# Altium PCB Regulador_5v_FF21.PcbDoc
Units mm, origin at the board's own origin, x right, y up, seen from the top; angles counter-clockwise.
Board outline 49 x 26 mm, 2 copper layers (Top Layer, Bottom Layer); 17 components, 10 nets, 41 pads, 0 vias.
Unrouted connection lines stored in the file: 29.
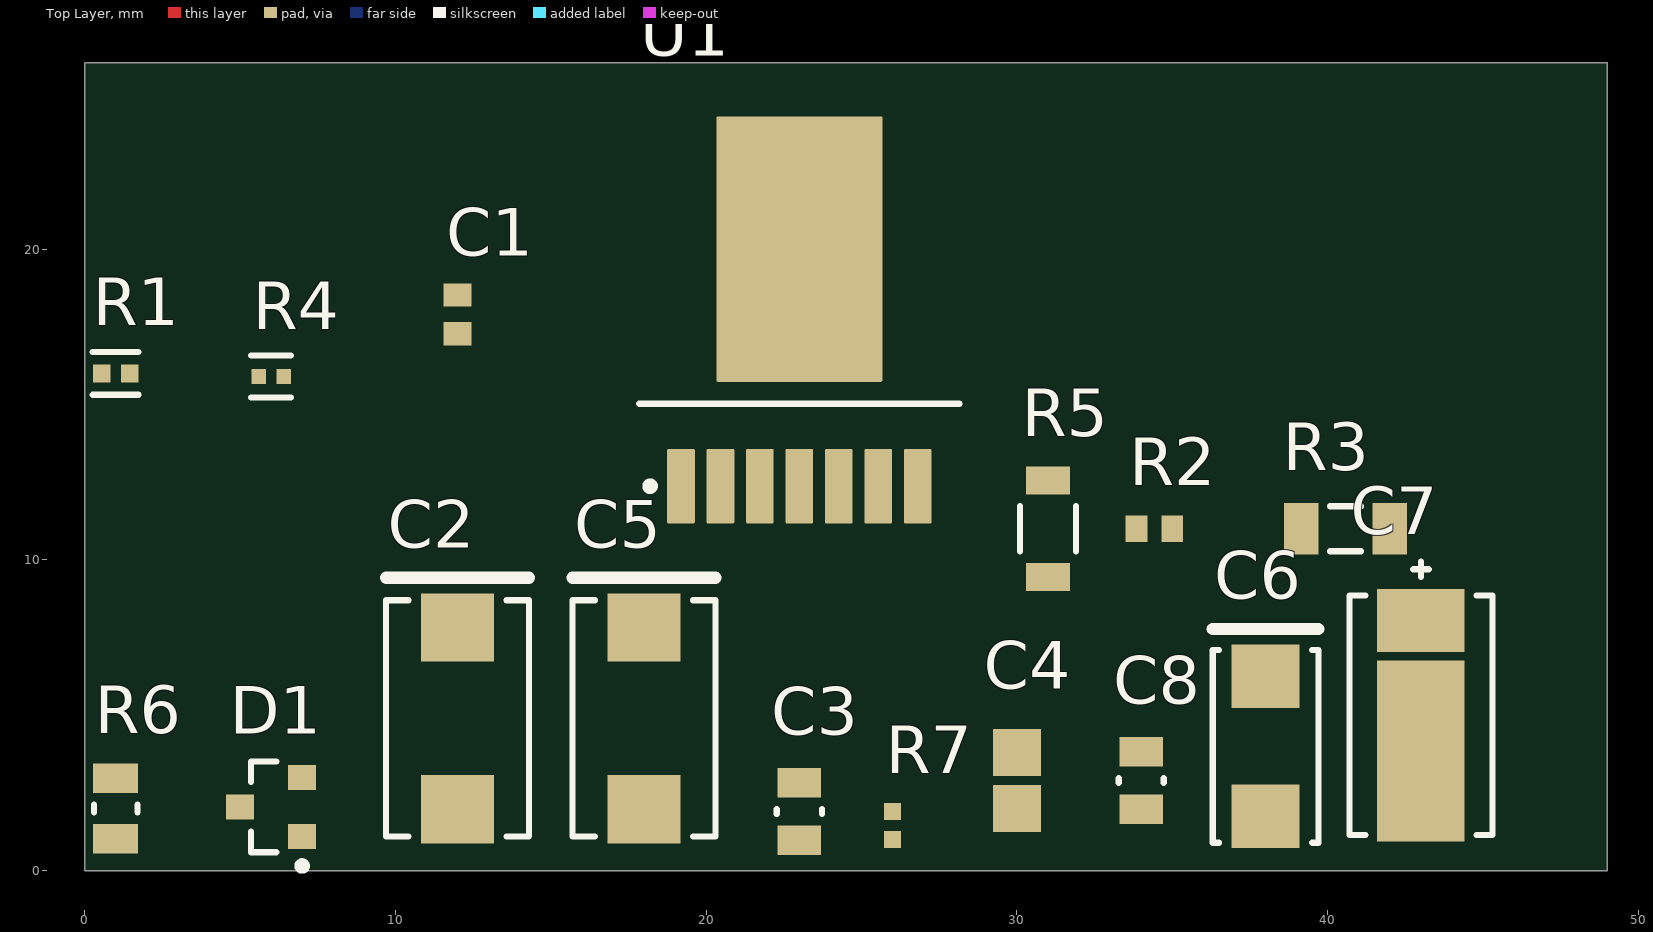
[diagram p0: Top Layer view]
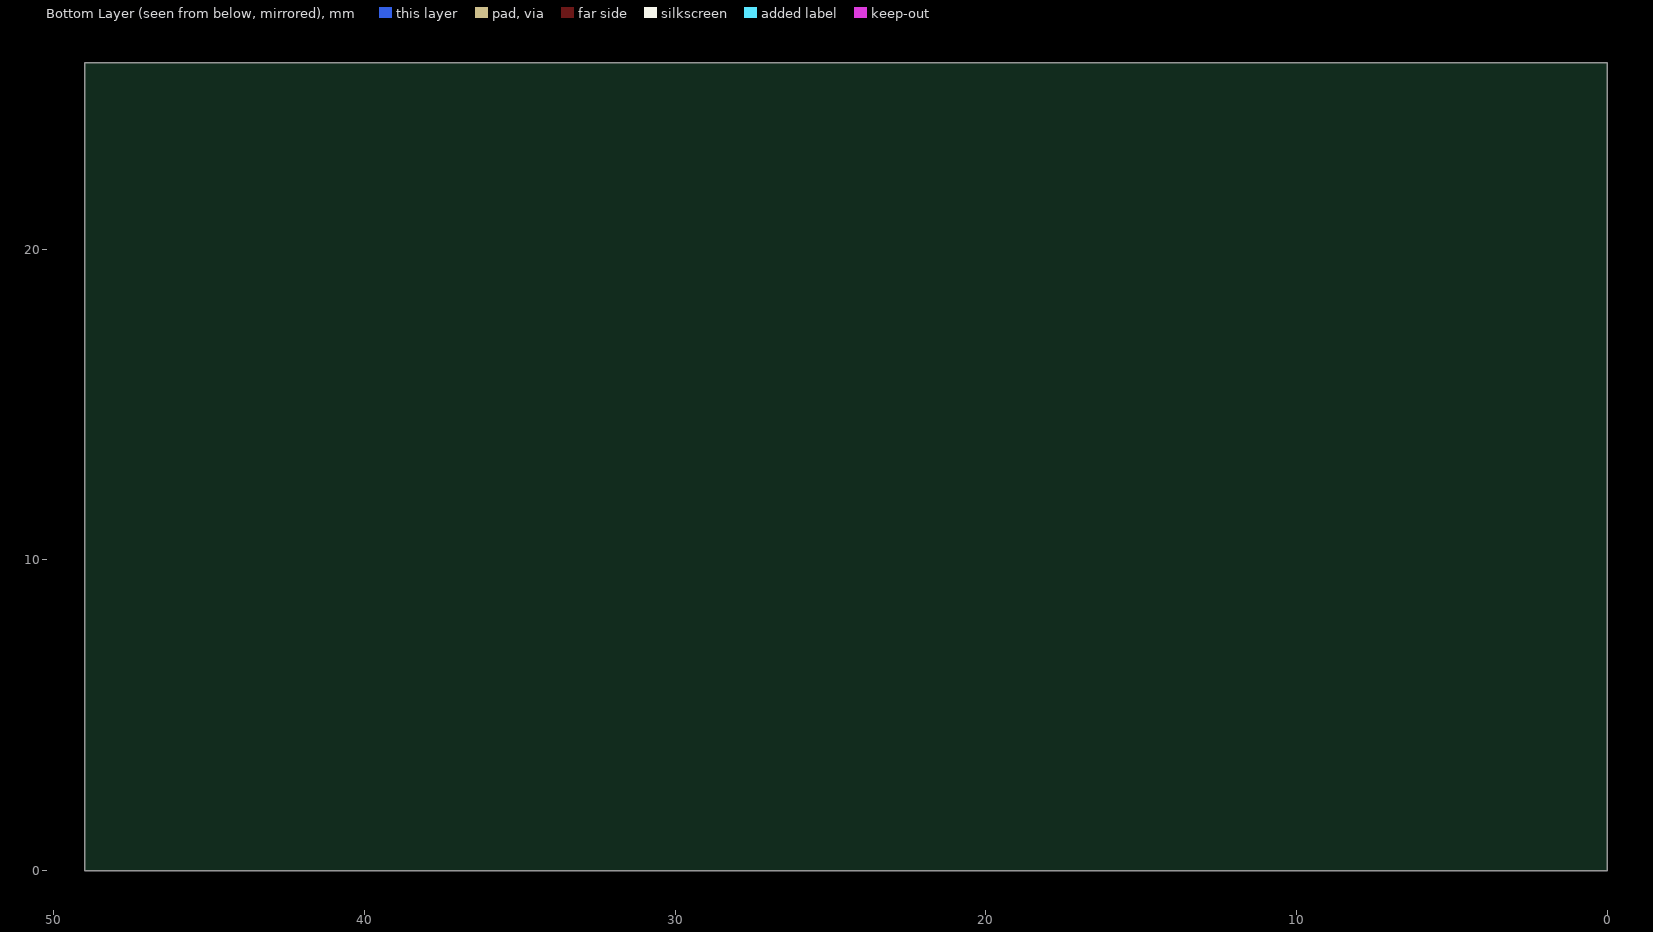
[diagram p1: Bottom Layer view, seen from below]

## Layer stack, top to bottom
Top Solder: solder mask 0.0102, Solder Resist, Dk 3.5
Top Layer: signal copper 0.0356
Dielectric 1: dielectric 0.32, FR-4, Dk 4.8
Bottom Layer: signal copper 0.0356
Bottom Solder: solder mask 0.0102, Solder Resist, Dk 3.5

## Board outline
0,0 49,0 49,26 0,26

## Design rules (kind name [scope] priority, off if disabled: settings)
Clearance [All] p1: gap=0.254 ignorepadtopadclearanceinfootprint=FALSE except(0: Arc-Hole Track-Hole SMDPad-Hole THPad-Hole Via-Hole Fill-Hole Poly-Hole Region-Hole Text-Hole)
PolygonConnect [All] p1: connectstyle=Relief reliefconductorwidth=0.254 reliefentries=4 polygonreliefangle="90 Angle" airgapwidth=0.254
RoomDefinition Regulador_5v_FF21 [InComponentClass('Regulador_5v_FF21')] p1: confinementstyle=ConfineIn formatcopy=TRUE lockcomponents=FALSE outline 0,-0.1 49,-0.1 49,26 0,26
RoutingVias [All] p1: holewidth=0.711 width=1.27 viastyle="Through Hole" minholewidth=0.711 minwidth=1.27 maxholewidth=0.711 maxwidth=1.27
SolderMaskExpansion [All] p1: expansion=0.102 istentingtop=FALSE
Width [All] p1: maxlimit=0.254 minlimit=0.254 preferedwidth=0.254
30 further rules are at their usual default settings.

## Components (designator, comment, footprint, x,y, rotation, side; value= is the part's Value field where it differs from the comment)
C1 "VJ0603Y103KXAAC31" CAPC1608X97X38LL15T08 12,17.9 r270 top
C2 "T495D157K010ATE100" KEMT-T495-D_L 12,4.9 r270 top
C3 "CC0805KRX7R9BB473" FP-CC0805-0_85-MFG 23,1.9 r270 top value="47 nF"
C4 "C0805F474K3RACTU" CAPC2013X140X50ML20T25 30,2.9 r90 top
C5 "T495D157K010ATE100" KEMT-T495-D_L 18,4.9 r270 top
C6 "TPSC107K010R0075" AVX-C2312_L 38,4 r270 top
C7 "T528Z227M006ATE009" FP-T528Z227M006ATE009-MFG 43,5 r270 top
C8 "CC0805KRX7R9BB473" FP-CC0805-0_85-MFG 34,2.9 r270 top value="47 nF"
D1 "SZBZX84B5V1LT1G" ONSC-SOT-23-3-318-08_V 6,2.05 r180 top
R1 "CRCW040220K0FKED" FP-CRCW0402-e3-IPC_B 1,16 r0 top
R2 "CRCW060321K0FKEA" RESC1609X50X30LL10T20 34.425,11 r0 top
R3 "ERJ-8ENF23R7V" RESC3216X70X50NL05T20 40.575,11 r0 top
R4 "CRCW0402100RFKED" FP-CRCW0402-e3-IPC_C 6,15.9 r0 top
R5 "RN732BLTD4001B25" FP-RN732B-MFG 31,11 r90 top
R6 "CRCW080540K0FKEA" FP-CRCW0805-e3-MFG 1,2 r270 top
R7 "CRCW04021K50FKED" RESC1005X40X25NL05T05 26,1.45 r90 top
U1 "LMZ23605TZ/NOPB" NDW0007A_V 23,17.72 r90 top

## Footprints (in the part's own frame and the unit in brackets; to place one, negate y for a bottom-side part, rotate by r counter-clockwise, add the part's x,y. Pads: shape width x height; smd on the part's side, far side on the other; paste and mask are expansions set on the pad)
AVX-C2312_L [mm] "Molded Capacitor, 2-Leads, Body 6.2x3.4mm, IPC High Density"
  rect 2.05x2.2 smd: 1(-2.25,0) 2(2.25,0)
  silkscreen extent -3.77,-1.7 3.1,1.7, body extent -3.32,-1.7 3.32,1.7, height 2.8
CAPC1608X97X38LL15T08 [mm] "Chip Capacitor, 2-Leads, Body 1.60x0.80mm, IPC High Density"
  rect 0.75x0.9 smd: 1(-0.625,0) 2(0.625,0)
  body extent -0.87,-0.48 0.87,0.48, height 0.97
CAPC2013X140X50ML20T25 [mm] "Chip Capacitor, 2-Leads, Body 2.00x1.25mm, IPC Low Density"
  rect 1.5x1.55 smd: 1(-0.9,0) 2(0.9,0)
  body extent -1.1,-0.72 1.1,0.72, height 1.4
FP-CC0805-0_85-MFG [mm]
  rect 0.95x1.4 smd paste+0 mask+0: 1(-0.925,0) 2(0.925,0)
  silkscreen extent -0.08,-0.72 0.08,0.72, body extent -1.6,-1.05 1.6,1.05, height 0.25
FP-CRCW0402-e3-IPC_B [mm]
  rect 0.568x0.572 smd paste+0 mask+0: 1(-0.452,0) 2(0.452,0)
  silkscreen extent -0.74,-0.69 0.74,0.69, body extent -0.89,-0.44 0.89,0.44, height 0.25
FP-CRCW0402-e3-IPC_C [mm]
  rect 0.468x0.472 smd paste+0 mask+0: 1(-0.402,0) 2(0.402,0)
  silkscreen extent -0.64,-0.67 0.64,0.67, body extent -0.74,-0.38 0.74,0.38, height 0.25
FP-CRCW0805-e3-MFG [mm]
  rect 0.95x1.45 smd paste+0 mask+0: 1(-0.975,0) 2(0.975,0)
  silkscreen extent -0.13,-0.7 0.13,0.7, body extent -1.55,-0.82 1.55,0.82, height 0.25
FP-RN732B-MFG [mm]
  rect 0.9x1.4 smd paste+0 mask+0: 1(-1.55,0) 2(1.55,0)
  silkscreen extent -0.72,-0.9 0.72,0.9, body extent -2.1,-1 2.1,1, height 0.25
FP-T528Z227M006ATE009-MFG [mm]
  rect 5.82x2.82 smd paste+0 mask+0: 1(1.15,0)
  rect 2.02x2.82 smd paste+0 mask+0: 2(-3.05,0)
  silkscreen extent -4.95,-2.3 3.85,2.3, body extent -4.18,-2.42 4.18,2.42, height 0.25
KEMT-T495-D_L [mm] "Molded Capacitor, 2-Leads, Body 7.6x4.6mm, IPC High Density"
  rect 2.2x2.35 smd: 1(-2.925,0) 2(2.925,0)
  silkscreen extent -4.52,-2.3 3.8,2.3, body extent -4.02,-2.3 4.02,2.3, height 3.1
NDW0007A_V [mm] "D2-PAK, 8-Leads, Body 9.9x10.2mm, Pitch 1.27mm, Lead Span 13.8mm, TI Recommended"
  rrect11% 2.41x0.89 smd: 1(-5.35,3.81) 2(-5.35,2.54) 3(-5.35,1.27) 4(-5.35,0) 5(-5.35,-1.27) 6(-5.35,-2.54) 7(-5.35,-3.81)
  rrect2% 8.54x5.35 smd: 8(2.28,0)
  silkscreen extent -5.47,-5.15 -2.7,5.15, body extent -2.55,-5.2 7.55,5.2, height 4.67
ONSC-SOT-23-3-318-08_V [mm] "SOT23, 3-Leads, Body 2.92x1.3mm, Pitch 0.95mm"
  rect 0.9x0.8 smd: 1(-1,0.95) 2(-1,-0.95) 3(1,0)
  silkscreen extent -1.13,-1.46 0.65,2.02, body extent -0.65,-1.46 0.65,1.46, height 1.11
RESC1005X40X25NL05T05 [mm] "Chip Resistor, 2-Leads, Body 1.00x0.50mm, IPC Medium Density"
  rect 0.55x0.55 smd: 1(-0.45,0) 2(0.45,0)
  body extent -0.53,-0.27 0.53,0.28, height 0.4
RESC1609X50X30LL10T20 [mm] "Chip Resistor, 2-Leads, Body 1.55x0.85mm, IPC High Density"
  rect 0.7x0.85 smd: 1(-0.575,0) 2(0.575,0)
  body extent -0.82,-0.48 0.82,0.48, height 0.5
RESC3216X70X50NL05T20 [mm] "Chip Resistor, 2-Leads, Body 3.20x1.60mm, IPC Medium Density"
  rect 1.1x1.65 smd: 1(-1.425,0) 2(1.425,0)
  silkscreen extent -0.5,-0.72 0.5,0.72, body extent -1.63,-0.82 1.62,0.82, height 0.7

## Part data
C1: library part CMP-2006-00011-1, Manufacturer=Vitramon, Part Number=VJ0603Y103KXAAC31
C2 C5: library part CMP-2000-07208-1, "Capacitor, Tantalum, 150 uF, +/- 10%, 10 V, -55 to 125 degC, 2-Pin SMD, RoHS, Tape and Reel", Capacitance=150µF, Capacitance Tolerance=±10%, Capacitor Case Style=2917, Capacitor Terminals=SMD, Manufacturer=Kemet, Operating Temperature Range=-55°Cto+125°C, Package Description="2-Pin Surface Mount Device, Body 7.3 x 4.3 mm", Package Reference=T495-D, Voltage Rating=10V, Datasheet URL=http://capacitoredge.kemet.com/capedge2/DataSheet/Datasheet-T495D157K010ATE100.pdf?pn=T495D157K010ATE100, Datasheet Version=09/2016, ESR=0.1ohm, Manufacturer URL=http://www.kemet.com/, Mounting Technology=SurfaceMount, MSL=MSL1-Unlimited
C3 C8: library part CMP-03422-000052-1, "CAP CER 0.047UF 50V X7R 0805", Capacitance="47 nF", Manufacturer=Yageo, Package=CC0805-0.85, Temperature="-30°C to +85°C", Temperature Characteristic=X7R, Temperature Range High=+85°C, Temperature Range Low=-30°C, Tolerance=0.1, Voltage Rating="50 V", Automotive=No, Category=Cap, ComponentLink2Description=Datasheet, ComponentLink2URL=http://www.yageo.com/documents/recent/UPY-GPHC_Y5V_6.3V-to-50V_8.pdf, Device Class L1="Passive Components", Device Class L2=Capacitors, Device Class L3="Ceramic Capacitors", Digikey Description="CAP CER 0.047UF 50V X7R 0805", Footprint Url=http://www.yageo.com/exep/pages/download/literatures/UPY-C_GEN_24.pdf, Height=0.95mm, Ipc Land Pattern Name=CAPC200125X85, Lead Free=Yes, Manufacturer Part Number=CC0805KRX7R9BB473, Material=Ceramic, Mouser Description="Multilayer Ceramic Capacitors MLCC - SMD/SMT 47nF 50V X7R 10%", Octopart=https://octopart.com/cc0805krx7r9bb473-yageo-42181304, RoHS=TRUE
C4: library part CMP-2007-03309-1, Manufacturer=Kemet, Part Number=C0805F474K3RACTU
C6: library part CMP-2000-07293-1, "TPS Series, Low ESR, 100 uF, +/- 10%, 10 V, -55 to 125 degC, 2-Pin SMD (2312), RoHS, Tape and Reel", Capacitance=100000000pF, Case Code=C, Case Style=Molded, Manufacturer=AVX, Operating Temp Range=-55Cto125C, Package / Case=6032-28, Package Description="2-Pin Surface Mount Device, Body 6 x 3.25 mm", Package Reference=C2312, Tolerance (+ or -)=10%, Voltage=10VDC, Construction=SMTChip, Datasheet URL=http://download.siliconexpert.com/pdfs/2016/2/7/1/56/13/306/avx_/manual/6tps.pdf, Datasheet Version=01/2016, DCL=10uA, DELETED=Compliant, DF=8%, ESR=0.075ohm, Failure Rate=NotRequired, Insulation=NotRequired, Lead Spacing (nom)=NotRequiredmm, Length W/Weld=NotRequiredmm, Length W/Weld (max)=NotRequiredmm, Manufacturer URL=http://www.avx.com/, Mounting Style=SurfaceMount, Mounting Technology=SurfaceMount, Package URL=http://download.siliconexpert.com/pdfs/2016/2/7/1/56/13/306/avx_/manual/6tps.pdf, Packaging=TapeandReel, Polarity=Polar, Product Depth (mm)=3.2mm, Product Diameter (mm)=NotRequiredmm, Product Height (mm)=2.6mm, Product Length (mm)=6mm, Rad Hardened=No, Seal=NotRequired, Seated Plane Height=NotRequiredmm, Wire Form=NotRequired
C7: library part CMP-03017-000006-1, "CAP TANT POLY 220UF 6.3V 2917", Capacitance=220uF, Case Code (Imperial)=2917, Case Code (Metric)=7343, ESR (Equivalent Series Resistance)=9mR, Leakage Current=138.6uA, Max Operating Temperature=105°C, Min Operating Temperature=-55°C, Package Quantity=1, Ripple Current=6A, Tolerance=20%, Voltage Rating=6.3V, Case/Package=2917, Construction=Flat, Depth=4.3mm, Dissipation Factor=10%, Features="General Purpose", Height=1.7mm, Height - Seated (Max)=0.067inch, Length=7.3mm, Mount="Surface Mount", Packaging="Tape and Reel", Polarity=Polar, REACH SVHC="No SVHC", RoHS Compliant=Yes, Series="KO-CAP T528", Termination=SMD/SMT, Voltage Rating (DC)=6.3V, Width=4.3mm
D1: library part CMP-1060-00895-1, "Zener Voltage Regulator, 225 mW, 3-Pin SOT-23, Pb-Free, Tape and Reel", Manufacturer="On Semiconductor", ComponentLink1Description="Manufacturer URL", ComponentLink1URL=http://www.onsemi.com/, ComponentLink2Description=Datasheet, ComponentLink2URL=http://www.onsemi.com/pub_link/Collateral/BZX84C2V4LT1-D.PDF, ComponentLink3Description="Package Specification", ComponentLink3URL=http://www.onsemi.cn/pub_link/Collateral/318-08.PDF, DatasheetVersion="Rev. 17", Mounting Technology="Surface Mount", PackageDescription="3-Pin Small Outline Transistor, Body 2.92 x 1.3 mm, Pitch 0.95 mm", PackageReference=SOT-23-3-318-08, PackageVersion="Rev. AP, 11/2009", Packing="Tape and Reel", PartNumber=SZBZX84B5V1LT1G, RoHS=Pb-Free, VZ Typ (V)=5.1
R1: library part CMP-2002-08356-2, "RES Thick Film, 20kΩ, 1%, 0.063W, 100ppm/°C, 0402", Case Code (Imperial)=0402, Case Code (Metric)=1005, Max Operating Temperature=155°C, Max Power Dissipation=63mW, Min Operating Temperature=-55°C, Package Quantity=10, Resistance=20kR, Temperature Coefficient=100ppm/°C, Tolerance=1%, Voltage Rating=50V, Case/Package=0402, Composition="Thick Film", Contact Plating=Tin, Depth=0.5mm, Features="Automotive AEC-Q200", Height=0.35mm, Lead Free="Lead Free", Length=1mm, Military Standard=Not, Mount="Surface Mount", Number of Pins=2, Number of Terminations=2, Packaging="Tape and Reel", Power Rating=63mW, Radiation Hardening=No, Termination=SMD/SMT, Voltage Rating (DC)=50V, Weight=2.3E-05oz, Width=0.5mm, Working Voltage=50V
R2: library part CMP-2000-03080-1, Manufacturer="Vishay Dale", Part Number=CRCW060321K0FKEA
R3: library part CMP-2003-00238-1, Manufacturer=Panasonic, Part Number=ERJ-8ENF23R7V
R4: library part CMP-1011-00397-3, "RES Thick Film, 100Ω, 1%, 0.063W, 100ppm/°C, 0402", Case Code (Imperial)=0402, Case Code (Metric)=1005, Max Operating Temperature=155°C, Max Power Dissipation=63mW, Min Operating Temperature=-55°C, Package Quantity=10, Resistance=100R, Temperature Coefficient=100ppm/°C, Tolerance=1%, Voltage Rating=50V, Case/Package=0402, Composition="Thick Film", Contact Plating=Tin, Depth=0.5mm, Features="Automotive AEC-Q200", Height=0.35mm, Lead Free="Lead Free", Length=1mm, Military Standard=Not, Mount="Surface Mount", Number of Terminations=2, Packaging="Tape and Reel", Power Rating=63mW, Radiation Hardening=No, Termination=SMD/SMT, Voltage Rating (DC)=50V, Weight=2.3E-05oz, Width=0.02inch, Working Voltage=50V
R5: library part CMP-04015-017647-1, "4kΩ ±0.1% 0.125W, 1/8W Chip Resistor 1206 (3216 Metric) Moisture Resistant Thin Film", Case Code (Imperial)=1206, Case Code (Metric)=3216, Max Operating Temperature=125°C, Min Operating Temperature=-55°C, Power Rating=125mW, Resistance=4kR, Temperature Coefficient=25ppm/°C, Tolerance=0.1%, Voltage Rating=150V, Case/Package=1206, Composition="Thin Film", Height=0.6mm, Length=3.2mm, Packaging="Tape and Reel", Termination=SMD/SMT, Weight=0.000571oz, Width=1.6mm
R6: library part CMP-02407-003498-1, "RES Thick Film, 40kΩ, 1%, 0.125W, 100ppm/°C, 0805", Case/Package=0805, Max Operating Temperature=155°C, Max Power Dissipation=125mW, Min Operating Temperature=-55°C, Package Quantity=5000, Resistance=40kR, Temperature Coefficient=100ppm/°C, Tolerance=1%, Composition="Thick Film", Features="Automotive AEC-Q200", Height=0.02inch, Lead Free="Lead Free", Length=0.079inch, Number of Terminations=2, Packaging="Tape and Reel", Width=0.049inch
R7: library part CMP-2002-08297-1, Manufacturer="Vishay Dale", Part Number=CRCW04021K50FKED
U1: library part CMP-0069-02058-2, "5A SIMPLE SWITCHER® Power Module with 36V Maximum Input Voltage, 7 pin TO-PMOD, 45 Rail", Manufacturer="Texas Instruments", PackageTopMarking=NSUZXYTTE#*LMZ23605, PowerWise=N, ComponentLink1Description="Datasheet URL", ComponentLink1URL=http://www.ti.com/general/docs/lit/getliterature.tsp?genericPartNumber=LMZ23605&fileType=pdf, CompType=Switcher, PackageDescription="TO-PMOD-7, 10.16 x 9.85 x 4.57 mm Body, 7 Lead, 1.27mm Pitch, Surface Mount", PackageReference=NDW0007A, PinCount=7, RoHS=Y

## Nets (pads, with @x,y where several pads share a name; then routed paths per layer and width w, separated by ;. In a path a pad name is that pad's centre, name@x,y a point inside that pad or via, vN(x,y) a via of type N, cw(c..) or ccw(c..) an arc to the next point about the centre after c; other vN are vias at no path point)
GND: C1.1 U1.8
NetC1_2: C1.2 C2.1 C3.1 C5.1 U1.1
NetC2_2: C2.2 C3.2 C4.1 C5.2 C6.2 C7.1 C8.2 D1.1 R5.1 R6.2 R7.1 U1.4
NetC4_2: C4.2 U1.6
NetC6_1: C6.1 C7.2 C8.1 R3.2 U1.7
NetD1_3: D1.3 R1.1 R4.1 R6.1
NetR2_1: R2.1 R5.2 U1.5
NetR2_2: R2.2 R3.1
NetR4_2: R4.2 U1.3
NetR7_2: R7.2 U1.2
pads on no net: D1.2 R1.2